# Altium PCB SAMV71_Xplained_Ultra.PcbDoc (part 2 of 9)
Units mm, origin at the board's own origin, x right, y up, seen from the top; angles counter-clockwise.
Board outline 90 x 135 mm, 8 copper layers (Top Layer LF-Signals, Ground Plane 1 (GND), Power Plane (VCC), Ground Plane 2 (GND), Signal Layer 1, Signal Layer 2, Ground Plane 3 (GND), Bottom Layer LF-Signals), stack 1.632 mm thick; 483 components, 411 nets, 1994 pads, 1021 vias.
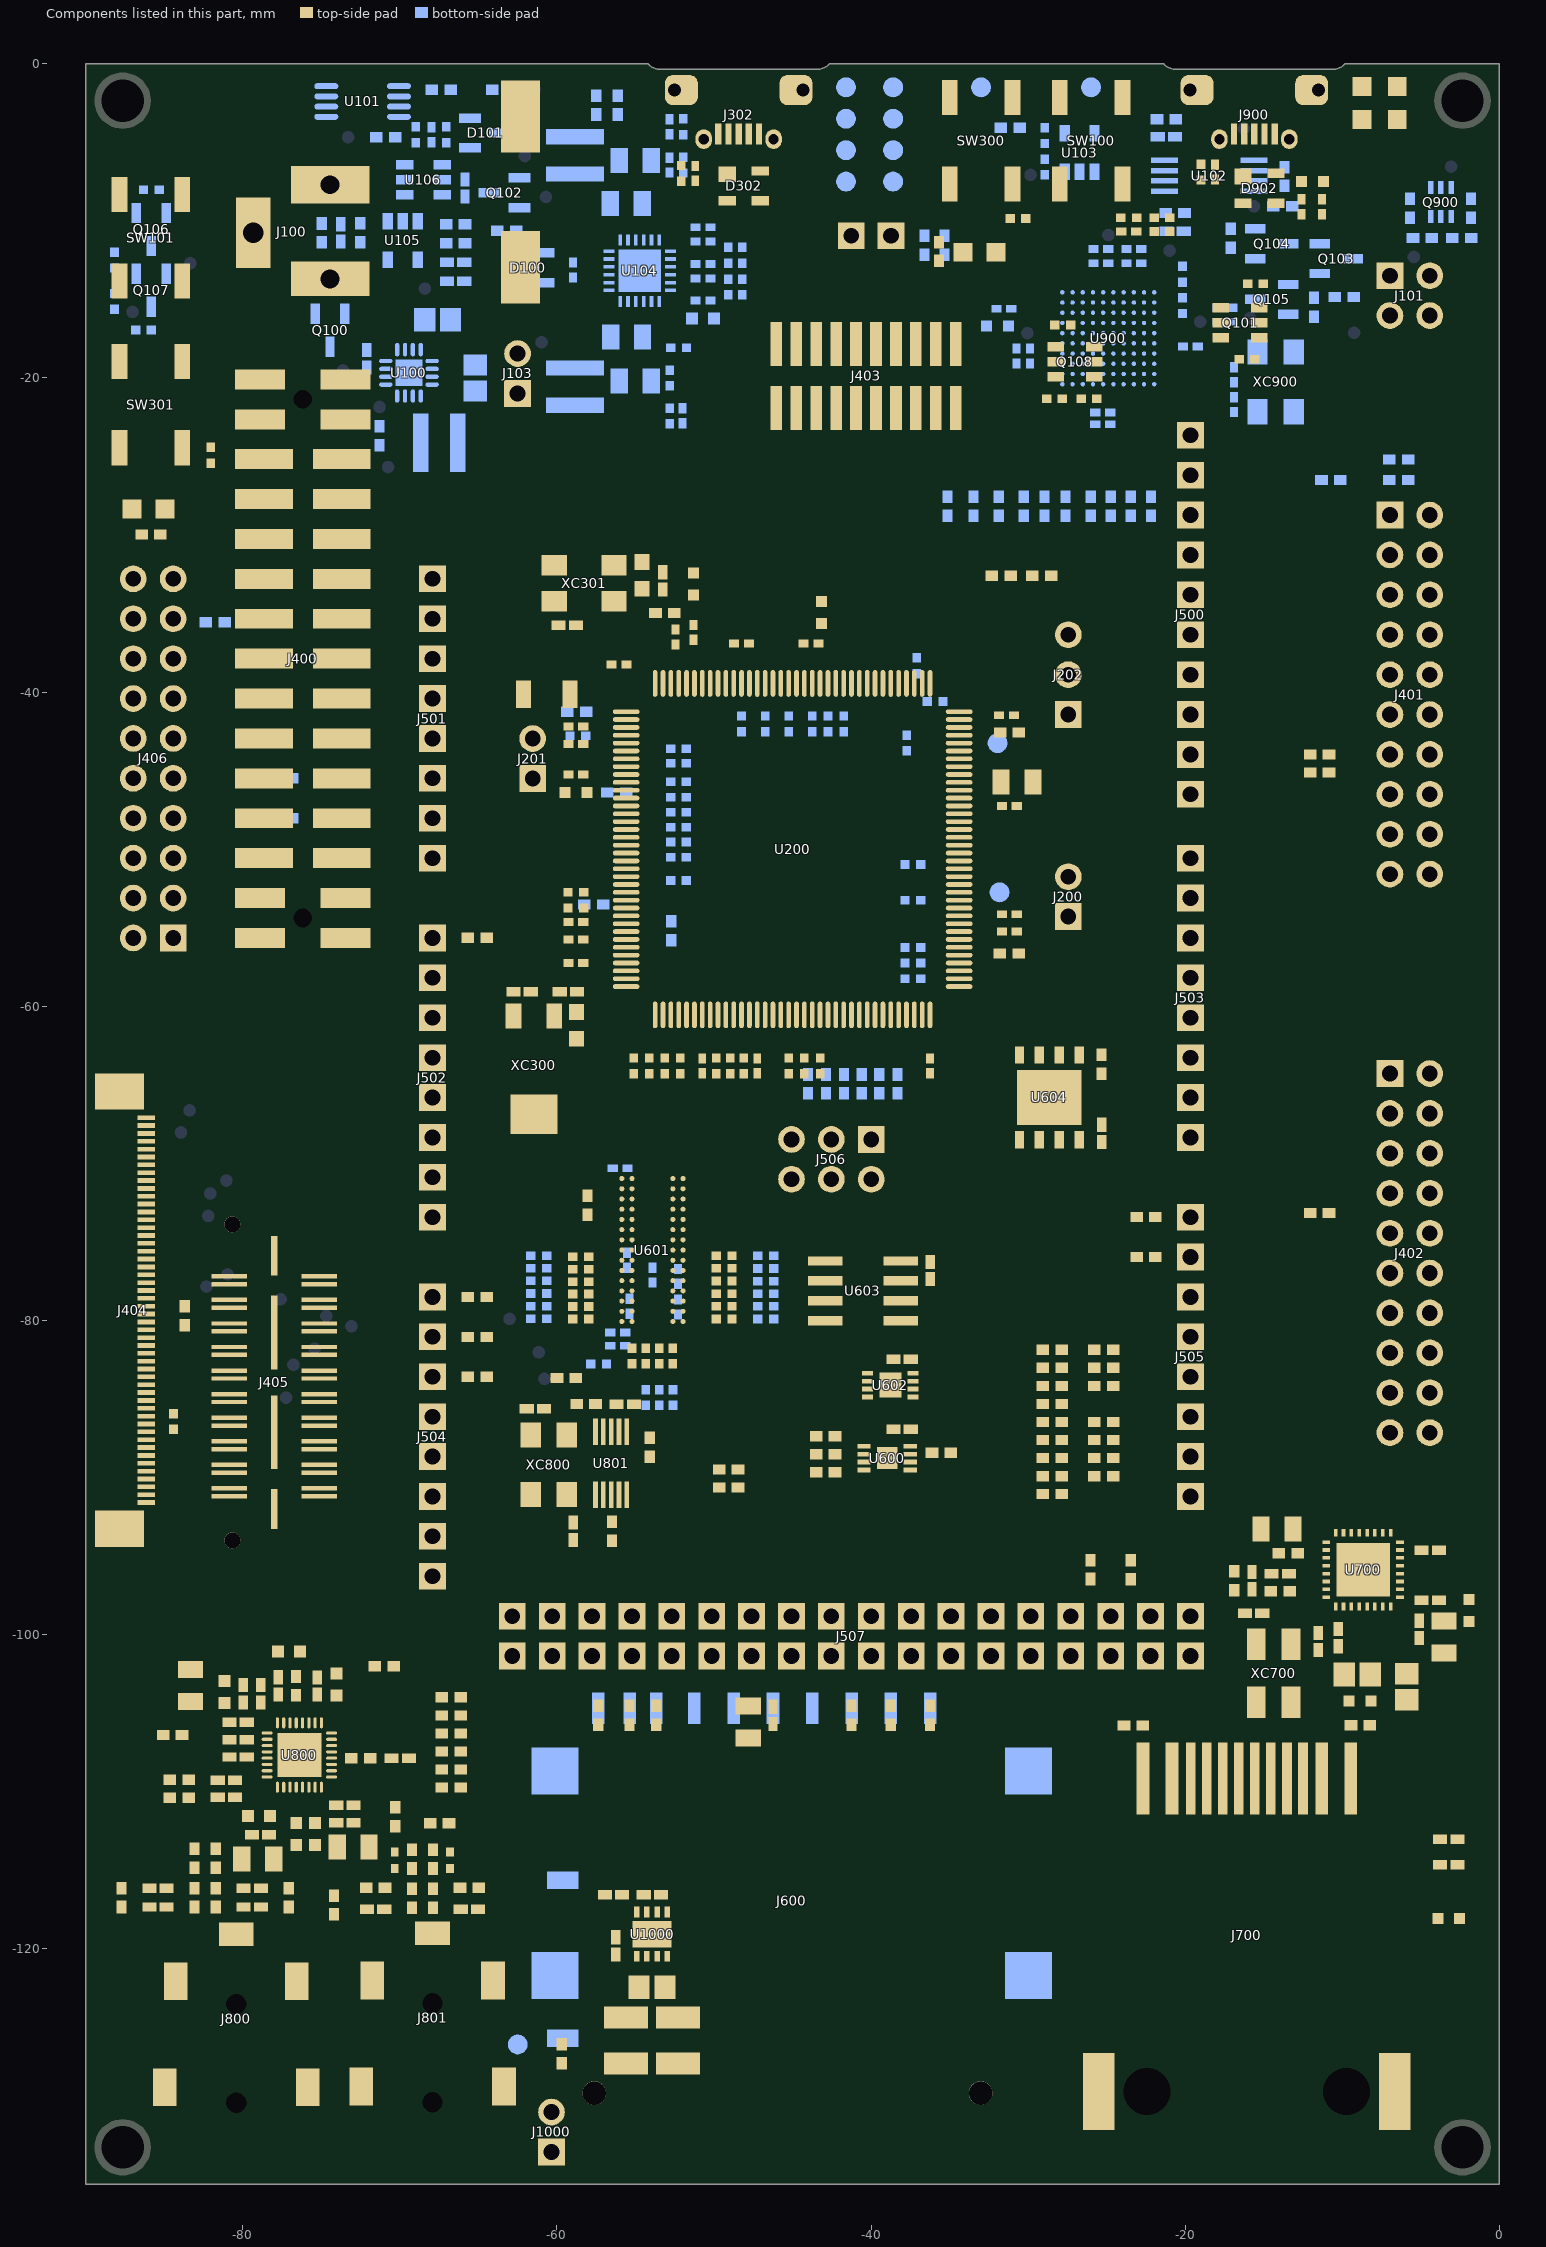
[diagram p8: the components of this part, seen from the top]

## Components (designator, comment, footprint, x,y, rotation, side; value= is the part's Value field where it differs from the comment) (continued)
Q106 "" AP5-00002 -85.825,-10.55 r270 bottom value=IRLML6402
Q107 "" AP5-00002 -85.825,-14.425 r270 bottom value=2N7002,215
Q108 "Farnell no: 9844856" AP5-00008 -27.032,-18.968 r180 top value=FDC6327C
Q900 "" AP5-00001 -3.725,-8.8 r270 bottom value=2N7002DW
R100 "" AP2-00000 -57.507,-2.63 r90 bottom value=0R
R101 "" AP2-00000 -71.3,-23.675 r90 bottom value=100k
R102 "" AP2-00000 -36.6,-11.55 r90 bottom value=47k
R103 "" AP2-00000 -35.325,-11.55 r270 bottom value=47k
R104 "" AP2-00000 -63.2,-10.625 r0 bottom value=30k
R105 "" AP2-00000 -66.456,-10.216 r0 bottom value=470k
R106 "" AP2-00011 -21.475,-9.8 r0 top locked value=100k
R107 "" AP2-00011 -21.475,-10.675 r180 top value=330R
R108 "" AP2-00000 -63.518,-1.65 r180 bottom value=470R
R109 "" AP2-00000 -67.377,-1.65 r180 bottom value=0R
R110 "" AP2-00011 -23.6,-9.8 r0 top locked value=39R
R111 "" AP2-00000 -66.456,-11.43 r180 bottom value=453k
R112 "" AP2-00000 -70.9,-4.675 r0 bottom value=0R
R113 "" AP2-00000 -21.2,-3.525 r180 bottom locked value=1M
R114 "" AP2-00000 -17.1,-11.1 r90 bottom value=100k
R115 "" AP2-00000 -9.875,-14.85 r0 bottom value=39k
R116 "" AP2-00000 -13.675,-7.175 r90 bottom value=470k
R117 "" AP2-00000 -20.65,-9.5 r0 bottom value=470k
R118 "" AP2-00000 -13.8,-9.075 r180 bottom value=390R
R119 "" AP2-00000 -11.8,-15.5 r90 bottom locked value=47k
R120 "" AP2-00011 -28.95,-6.575 r270 bottom value=100k
R121 "" AP2-00011 -28.95,-4.575 r270 bottom value=100k
R122 "" AP2-00011 -52.832,-22.43 r270 bottom value=453k
R123 "" AP2-00011 -52.832,-20.005 r270 bottom value=150k
R124 "" AP2-00011 -51.957,-4.005 r90 bottom value=560k
R125 "" AP2-00011 -86.325,-16.95 r0 bottom value=200k
R126 "" AP2-00011 -51.957,-6.455 r270 bottom value=100k
R127 "" AP2-00011 -85.825,-8.025 r0 bottom value=470k
R128 "" AP2-00011 -48.207,-12.192 r270 bottom value=604K
R129 "" AP2-00011 -88.175,-15.125 r270 bottom value=10k
R130 "" AP2-00011 -49.107,-12.192 r90 bottom value=232K
R131 "" AP2-00011 -88.175,-12.5 r270 bottom value=470k
R132 "" AP2-00011 -48.207,-14.211 r90 bottom value=280k
R133 "" AP2-00011 -49.107,-14.211 r270 bottom value=200k
R134 "" AP2-00011 -52.257,-18.08 r0 bottom value=100k
R135 "" AP2-00000 -72.526,-10.76 r270 bottom value=470k
R136 "" AP2-00000 -74.983,-10.769 r90 bottom value=47k
R137 "" AP2-00011 -67.05,-4.521 r270 bottom value=100k
R138 "" AP2-00011 -69.004,-4.52 r270 bottom value=180k
R139 "" AP2-00011 -28.327,-21.324 r180 top value=330R
R140 "" AP2-00011 -16.075,-18.8 r0 top value=100k
R141 "" AP2-00011 -26.132,-21.324 r0 top value=100k
R142 "" AP2-00011 -27.797,-16.63 r180 top value=100k
R143 "" AP2-00011 -15.525,-14 r180 top value=100k
R200 "" AP2-00000 -66.725,-104 r180 top value=0R
R201 "" AP2-00000 -11.45,-43.975 r0 top value=0R
R202 "" AP2-00000 -11.45,-45.125 r0 top value=0R
R203 "" AP2-00000 -83.706,-79.7 r90 top value=0R
R204 "" AP2-00000 -38.328,-64.949 r270 bottom value=39R
R205 "" AP2-00000 -42.878,-64.949 r270 bottom value=39R
R206 "" AP2-00000 -41.728,-64.949 r90 bottom value=39R
R207 "" AP2-00000 -22.5,-73.419 r0 top value=0R
R208 "" AP2-00000 -22.5,-75.969 r0 top value=0R
R209 "" AP2-00000 -11.45,-73.175 r0 top value=0R
R210 "" AP2-00000 -31.193,-42.578 r0 top value=0R
R211 "" AP2-00000 -23.475,-95.875 r270 top value=0R
R212 "" AP2-00000 -39.478,-64.949 r270 bottom value=39R
R213 "" AP2-00000 -26.025,-95.869 r270 top value=0R
R214 "" AP2-00000 -44.028,-64.949 r90 bottom value=39R
R215 "" AP2-00000 -65.075,-55.644 r180 top value=0R
R216 "" AP2-00000 -58.75,-41.25 r180 bottom value=0R
R217 "" AP2-00000 -56.203,-46.394 r180 bottom value=0R
R218 "" AP2-00000 -52.725,-55.2 r270 bottom value=0R
R219 "" AP2-00000 -65.075,-78.519 r180 top value=0R
R220 "" AP2-00000 -65.075,-81.069 r180 top value=0R
R221 "" AP2-00000 -65.075,-83.594 r180 top value=0R
R222 "" AP2-00000 -57.66,-53.525 r180 bottom value=0R
R223 "" AP2-00000 -66.725,-107.45 r180 top value=0R
R224 "" AP2-00000 -66.725,-109.75 r180 top value=0R
R225 "" AP2-00000 -59.4,-83.675 r0 top value=0R
R226 "" AP2-00000 -66.725,-108.6 r180 top value=0R
R227 "" AP2-00000 -40.6,-64.95 r270 bottom value=39R
R228 "" AP2-00000 -66.725,-106.3 r180 top value=0R
R229 "" AP2-00000 -66.725,-105.15 r180 top value=0R
R230 "" AP2-00000 -54.1,-88.075 r270 top value=0R
R231 "" AP2-00000 -49.075,-89.5 r180 top value=1k
R232 "" AP2-00000 -49.075,-90.65 r180 top value=1k
R233 "" AP2-00000 -53.128,-34.968 r180 top value=5.62k
R234 "" AP2-00000 -31.2,-56.649 r0 top value=0R
R235 "" AP2-00011 -52.267,-46.702 r0 bottom value=22R
R236 "" AP2-00011 -55.111,-63.8 r270 top value=22R
R237 "" AP2-00011 -54.124,-63.8 r270 top value=22R
R238 "" AP2-00011 -53.137,-63.8 r270 top value=22R
R239 "" AP2-00011 -52.151,-63.8 r270 top value=22R
R240 "" AP2-00011 -43.25,-63.8 r270 top value=22R
R241 "" AP2-00011 -45.25,-63.8 r270 top value=22R
R242 "" AP2-00011 -48.975,-63.8 r270 top value=22R
R243 "" AP2-00011 -58.67,-42.775 r180 bottom value=22R
R244 "" AP2-00011 -52.262,-43.606 r0 bottom value=22R
R245 "" AP2-00011 -52.267,-44.522 r0 bottom value=22R
R246 "" AP2-00011 -52.267,-45.705 r0 bottom value=22R
R247 "" AP2-00011 -58.8,-52.75 r180 top value=22R
R248 "" AP2-00011 -58.8,-53.75 r180 top value=22R
R249 "" AP2-00011 -48.1,-63.8 r270 top value=22R
R250 "" AP2-00011 -49.85,-63.8 r270 top value=22R
R251 "" AP2-00011 -41.75,-42.026 r270 bottom value=22R
R252 "" AP2-00011 -42.75,-42.026 r270 bottom value=22R
R253 "" AP2-00011 -43.75,-42.026 r270 bottom value=22R
R254 "" AP2-00011 -45.25,-42.026 r270 bottom value=22R
R255 "" AP2-00011 -46.75,-42.026 r270 bottom value=22R
R256 "" AP2-00011 -48.25,-42.026 r270 bottom value=22R
R257 "" AP2-00011 -52.267,-48.6 r0 bottom value=22R
R258 "" AP2-00011 -52.267,-47.641 r0 bottom value=22R
R259 "" AP2-00011 -37.343,-57.251 r180 bottom value=22R
R260 "" AP2-00011 -52.267,-49.55 r0 bottom value=22R
R261 "" AP2-00011 -37.343,-50.975 r180 bottom value=22R
R262 "" AP2-00011 -52.267,-52 r0 bottom value=22R
R263 "" AP2-00011 -37.343,-58.251 r180 bottom value=22R
R264 "" AP2-00011 -37.343,-53.265 r180 bottom value=22R
R265 "" AP2-00011 -44.25,-63.8 r270 top value=22R
R266 "" AP2-00011 -52.267,-50.513 r0 bottom value=22R
R267 "" AP2-00011 -37.1,-38.325 r270 bottom value=22R
R268 "" AP2-00011 -37.343,-56.265 r180 bottom value=22R
R269 "" AP2-00011 -37.725,-43.25 r270 bottom value=22R
R270 "" AP2-00011 -35.925,-40.6 r180 bottom value=22R
R300 "" AP2-00011 -30.65,-9.85 r0 top locked value=39R
R301 "" AP2-00011 -82.05,-24.925 r270 top value=39R
R302 "" AP2-00000 -85.85,-29.969 r0 top value=330R
R303 "" AP2-00000 -35.675,-11.95 r90 top value=330R
R304 "" AP2-00011 -52.1,-6.978 r90 top locked value=1M
R305 "" AP2-00000 -31.715,-32.6 r180 top value=30k
R306 "" AP2-00000 -29.142,-32.6 r180 top value=47k
R307 "" AP2-00000 -31.15,-4.075 r180 bottom value=330R
R400 "" AP2-00000 -77.45,-48.034 r0 bottom value=0R
R401 "" AP2-00000 -77.45,-45.494 r0 bottom value=0R
R402 "" AP2-00000 -81.759,-35.56 r0 bottom value=0R
R403 "" AP2-00000 -78.777,-40.421 r0 bottom value=0R
R404 "" AP2-00011 -84.414,-86.446 r270 top value=100k
R600 "" AP2-00000 -42.9,-89.675 r180 top value=10k
R601 "" AP2-00000 -42.9,-88.525 r180 top value=10k
R602 "" AP2-00000 -42.9,-87.375 r180 top value=10k
R603 "" AP2-00000 -35.525,-88.425 r180 top value=10k
R604 "" AP2-00000 -58.05,-72.675 r270 top value=100k
R605 "" AP2-00000 -25.325,-63.7 r90 top value=100k
R606 "" AP2-00000 -41.253,-105.15 r270 top value=10k
R607 "" AP2-00000 -38.753,-105.15 r270 top value=100k
R608 "" AP2-00000 -36.253,-105.15 r270 top value=100k
R609 "" AP2-00000 -55.378,-105.15 r270 top value=100k
R610 "" AP2-00000 -53.678,-105.15 r270 top value=100k
R611 "" AP2-00000 -57.378,-105.15 r270 top value=10k
R612 "" AP2-00000 -59.7,-126.7 r270 top value=10k
R613 "" AP2-00011 -52.617,-84.916 r90 bottom value=200R
R614 "" AP2-00011 -46.71,-79.916 r180 bottom value=200R
R615 "" AP2-00011 -46.71,-79.111 r180 bottom value=200R
R616 "" AP2-00011 -46.71,-78.306 r180 bottom value=200R
R617 "" AP2-00011 -53.483,-84.916 r90 bottom value=200R
R618 "" AP2-00011 -46.71,-77.501 r180 bottom value=200R
R619 "" AP2-00011 -46.71,-76.696 r180 bottom value=200R
R620 "" AP2-00011 -46.71,-75.891 r180 bottom value=200R
R621 "" AP2-00011 -61.165,-75.88 r0 bottom value=200R
R622 "" AP2-00011 -61.165,-76.685 r0 bottom value=200R
R623 "" AP2-00011 -61.165,-77.49 r0 bottom value=200R
R624 "" AP2-00011 -54.35,-84.916 r90 bottom value=200R
R625 "" AP2-00011 -61.165,-78.295 r0 bottom value=200R
R626 "" AP2-00011 -61.165,-79.1 r0 bottom value=200R
R627 "" AP2-00011 -61.165,-79.905 r0 bottom value=200R
R628 "" AP2-00011 -57.348,-82.777 r0 bottom value=200R
R629 "" AP2-00011 -55.222,-82.277 r90 top value=33R
R630 "" AP2-00011 -58.486,-79.911 r0 top value=33R
R631 "" AP2-00011 -58.486,-79.119 r0 top value=33R
R632 "" AP2-00011 -58.486,-78.327 r0 top value=33R
R633 "" AP2-00011 -54.355,-82.277 r90 top value=33R
R634 "" AP2-00011 -58.486,-77.534 r0 top value=33R
R635 "" AP2-00011 -58.486,-76.742 r0 top value=33R
R636 "" AP2-00011 -58.486,-75.95 r0 top value=33R
R637 "" AP2-00011 -49.358,-75.885 r180 top value=33R
R638 "" AP2-00011 -49.358,-76.69 r180 top value=33R
R639 "" AP2-00011 -49.358,-77.495 r180 top value=33R
R640 "" AP2-00011 -53.489,-82.277 r90 top value=33R
R641 "" AP2-00011 -49.358,-78.301 r180 top value=33R
R642 "" AP2-00011 -49.358,-79.106 r180 top value=33R
R643 "" AP2-00011 -49.358,-79.911 r180 top value=33R
R644 "" AP2-00011 -52.622,-82.277 r90 top value=33R
R700 "" AP2-00000 -28.469,-91.048 r180 top value=1k
R701 "" AP2-00000 -8.85,-105.775 r0 top value=220R
R702 "" AP2-00000 -16.875,-96.575 r270 top value=100k
R703 "" AP2-00000 -23.3,-105.8 r0 top value=220R
R704 "" AP2-00000 -13.95,-97.25 r0 top value=6.04K
R705 "" AP2-00000 -28.469,-84.173 r180 top value=4.7k
R706 "" AP2-00000 -28.469,-87.623 r180 top value=1k
R707 "" AP2-00000 -28.469,-86.473 r180 top value=4.7k
R708 "" AP2-00000 -28.469,-83.023 r180 top value=4.7k
R709 "" AP2-00000 -28.469,-81.873 r180 top value=4.7k
R710 "" AP2-00000 -28.469,-89.923 r180 top value=4.7k
R711 "" AP2-00000 -28.469,-85.323 r180 top value=4.7k
R712 "" AP2-00000 -13.45,-94.825 r180 top value=4.7k
R713 "" AP2-00000 -28.469,-88.773 r180 top value=4.7k
R714 "" AP2-00000 -25.194,-86.473 r0 top value=4.7k
R715 "" AP2-00000 -25.194,-83.023 r0 top value=4.7k
R716 "" AP2-00000 -25.194,-81.873 r0 top value=4.7k
R717 "" AP2-00000 -25.194,-89.923 r0 top value=4.7k
R718 "" AP2-00000 -25.194,-88.773 r180 top value=4.7k
R719 "" AP2-00000 -25.188,-84.173 r0 top value=4.7k
R720 "" AP2-00000 -25.194,-87.623 r0 top value=4.7k
R800 "" AP2-00000 -83.075,-114.25 r270 top value=0R
R801 "" AP2-00000 -72.5,-107.875 r180 top value=22R
R802 "" AP2-00000 -81.725,-114.25 r270 top value=0R
R803 "" AP2-00000 -69.225,-114.3 r90 top value=2.2k
R804 "" AP2-00000 -67.9,-114.3 r90 top value=2.2k
R806 "" AP2-00000 -70.3,-111.6 r90 top value=0R
R807 "" AP2-00000 -77.075,-116.75 r90 top value=20R
R808 "" AP2-00000 -87.725,-116.75 r90 top value=20R
R809 "" AP2-00000 -84.05,-109.25 r0 top value=20R
R810 "" AP2-00000 -84.05,-110.4 r0 top value=20R
R811 "" AP2-00000 -67.475,-112.025 r180 top value=0R
R812 "" AP2-00000 -71.55,-116.125 r0 top value=47k
R813 "" AP2-00000 -65.575,-116.125 r180 top value=47k
R814 "" AP2-00000 -84.475,-106.4 r0 top value=0R
R815 "" AP2-00000 -74.2,-117.225 r90 top value=0R
R816 "" AP2-00000 -71,-102.025 r180 top value=0R
R817 "" AP2-00000 -58.15,-85.325 r180 top value=39R
R818 "" AP2-00000 -56.5,-93.425 r90 top value=0R
R819 "" AP2-00000 -76.625,-103.275 r270 top value=0R
R900 "" AP2-00000 -35.131,-28.169 r270 bottom value=330R
R901 "" AP2-00000 -10.725,-26.5 r0 bottom locked value=1k
R902 "" AP2-00000 -6.4,-25.2 r0 bottom locked value=1k
R903 "" AP2-00000 -6.4,-26.5 r0 bottom locked value=1k
R904 "" AP2-00000 -28.956,-28.162 r270 bottom value=330R
R905 "" AP2-00000 -27.631,-28.162 r270 bottom value=330R
R906 "" AP2-00000 -5.7,-9.2 r270 bottom locked value=1M
R907 "" AP2-00000 -4.9,-11.1 r180 bottom value=330R
R908 "" AP2-00000 -1.8,-9.2 r90 bottom value=330R
R909 "" AP2-00000 -2.4,-11.1 r180 bottom value=1M
R910 "" AP2-00000 -31.881,-28.169 r90 bottom value=330R
R911 "" AP2-00000 -26.016,-28.162 r90 bottom value=330R
R912 "" AP2-00000 -24.741,-28.162 r90 bottom value=330R
R913 "" AP2-00000 -23.466,-28.162 r90 bottom value=330R
R914 "" AP2-00000 -22.191,-28.162 r90 bottom value=330R
R915 "" AP2-00000 -33.481,-28.169 r270 bottom value=330R
R916 "" AP2-00011 -20.175,-13.4 r90 bottom locked value=39R
R917 "" AP2-00011 -20.175,-15.4 r270 bottom locked value=39R
R918 "" AP2-00011 -17.475,-15.525 r180 bottom locked value=6.81k
R919 "" AP2-00011 -19,-6.9 r90 top locked value=1M
R920 "" AP2-00000 -56.132,-2.63 r270 bottom value=0R
R921 "" AP2-00000 -30.281,-28.162 r270 bottom value=330R
R1000 "Generic component" AP2-00008 -52.305,-125.85 r270 top value=62R
R1001 "Generic component" AP2-00008 -55.605,-125.85 r90 top value=62R
SW100 "" AP8-00137 -26,-4.9 r90 top locked value=SKRAAKE010
SW101 "" AP8-00137 -85.85,-11.075 r90 top value=SKRAAKE010
SW300 "same as A08-0091 but less force is needed; Can be ordered in low volumes from Mouser" AP8-00137 -33,-4.9 r90 top locked value=SKRAAKE010
SW301 "same as A08-0091 but less force is needed; Can be ordered in low volumes from Mouser" AP8-00137 -85.85,-21.7 r90 top value=SKRAAKE010
TP100 "" AP8-00010 -26,-1.5 r270 bottom locked value=TESTPAD
TP200 "" AP8-00010 -31.825,-52.75 r90 bottom locked value=TESTPAD
TP201 "" AP8-00010 -31.95,-43.25 r90 bottom locked value=TESTPAD
TP300 "" AP8-00010 -33,-1.5 r270 bottom locked value=TESTPAD
TP600 "" AP8-00010 -62.5,-126.1 r90 bottom locked value=TESTPAD
TP900 "" AP8-00010 -41.6,-1.5 r270 bottom locked value=TESTPAD
TP901 "" AP8-00010 -38.6,-1.5 r270 bottom locked value=TESTPAD
TP902 "" AP8-00010 -41.6,-3.5 r270 bottom locked value=TESTPAD
TP903 "" AP8-00010 -41.6,-5.5 r270 bottom locked value=TESTPAD
TP904 "" AP8-00010 -38.6,-5.5 r270 bottom locked value=TESTPAD
TP905 "" AP8-00010 -41.6,-7.5 r270 bottom locked value=TESTPAD
TP906 "" AP8-00010 -38.6,-3.5 r270 bottom locked value=TESTPAD
TP907 "" AP8-00010 -38.6,-7.5 r270 bottom locked value=TESTPAD
U100 "100% duty-cycle mode, supports input voltage close to 5V with 5V output!" AP6-00313 -69.425,-19.675 r90 bottom locked value=TPS62143
U101 "" AP6-00382 -72.375,-2.4 r90 bottom locked value=TPS3619-33
U102 "" AP6-00054 -18.475,-7.125 r180 bottom locked value=TPS2113PWR
U103 "" AP6-00087 -26.725,-5.65 r90 bottom value=STMPS2161STR
U104 "Auto-mode, no sync." AP6-00380 -54.732,-13.18 r90 bottom value=LM26480
U105 "" AP6-00087 -69.818,-11.238 r270 bottom value=BU7411SG-TR
U106 "" AP6-00056 -68.499,-7.387 r180 bottom value=TS5A3160DBVR
U200 "" AP6-00118 -45,-50 r0 top locked value="SAMV71Q21B ES2"
U600 "" AP6-00186 -38.975,-88.775 r0 top value=AT24MAC402-MAHM-T
U601 "" AP6-00400 -53.922,-75.525 r180 top locked value="IS42S16100H-7BLI SDRAM"
U602 "" AP6-00409 -38.775,-84.125 r0 top value=ATECC108-MAHDA
U603 "" AP6-00071 -40.525,-78.125 r0 top value=ATECC108-SSHDA
U604 "Also available as 32- and 64-Mbit." AP6-00402 -28.65,-65.8 r270 top locked value=S25FL116K
U700 "Industrial Extended Temperature" AP6-00349 -8.675,-95.875 r90 top value=KSZ8061RNBW
U800 "Wolfson Microelectronics" AP6-00420 -76.4,-107.675 r270 top value="WM8904 Audio Codec"
U801 "" AP6-00097 -56.55,-89.1 r270 top value=CS2100CP-CZZ
U900 "100 ball VFBGA" AP6-00206 -24.9,-17.475 r90 bottom locked value=AT32UC3A4256J-C1UR
U1000 "" AP6-00407 -53.95,-119.08 r270 top locked value=ATA6561-GBQW
XC300 "Farnell order no:1539364" AP7-00044 -61.475,-60.625 r180 top value="32.768kHz +/-20PPM 7pF  SMD"
XC301 "" AP7-00039 -58.275,-33.075 r0 top value=12.00MHz
XC700 "" AP7-00067 -14.376,-102.464 r90 top locked value=7B-25.000MAAJ-T
XC800 "" AP7-00039 -60.525,-89.2 r270 top locked value=12.00MHz
XC900 "" AP7-00039 -14.25,-20.25 r90 bottom locked value=12.00MHz

## Footprints (in the part's own frame and the unit in brackets; to place one, negate y for a bottom-side part, rotate by r counter-clockwise, add the part's x,y. Pads: shape width x height; smd on the part's side, far side on the other; paste and mask are expansions set on the pad)
AP1-00001 [mm] "Standard 0402 SMD capacitor footprint"
  rect 0.9x0.6 smd: 1(-0.55,0) 2(0.55,0)
  silkscreen extent -1.25,-0.55 1.25,0.55, body extent -0.5,-0.3 0.5,0.3, height 0.2
AP1-00003 [mm]
  rect 1.35x1.5 smd: 1(-0.825,0) 2(0.825,0)
  silkscreen extent -1.78,-1 1.78,1, body extent -1,-0.63 1,0.63, height 0.78
AP1-00036 [mm] "SMD capacitors: 3216-18 EIA Case 1206, polarized"
  rect 0.95x1.75 smd: 1(-1.475,0) 2(1.475,0)
  silkscreen extent -2.95,-1.12 2.2,1.12, body extent -1.6,-0.8 1.6,0.8, height 1
AP1-00038 [mm] "Generic pad 0402, spacing 0.45mm"
  rect 0.6x0.5 smd: 1(-0.525,0) 2(0.525,0)
  silkscreen extent -1.05,-0.48 1.05,0.47, body extent -0.5,-0.3 0.5,0.3, height 0.2
AP1-00039 [mil] "Capacitor 0603 Hight 0.8mm"
  rect 30x30 smd: 1(-27.5,0) 2(27.5,0)
  silkscreen extent -52,-24 51,24, body extent -31,-16 32,16, height 12
AP1-00041 [mil]
  rect 43x63 smd: 1(0,0) 2(80,0)
  silkscreen extent -30,-39 109,39, body extent 1,-25 79,25, height 31
AP1-00053 [mm] "Chip Capacitor, 2-Leads, Body 1.0x0.5mm, IPC High Density"
  rect 0.65x0.5 smd: 1(-0.475,0) 2(0.475,0)
  body extent -0.5,-0.3 0.5,0.3, height 0.2
AP1-00122 [mm]
  rect 4.6x2.5 smd: 1(-4.8,0) 2(4.8,0)
  silkscreen extent -6,-6 6,6, body extent -5.4,-5.4 5.4,5.4, height 6.9
AP2-00000 [mm] "Standard 0402 SMD resistor footprint"
  rect 0.8x0.65 smd: 1(-0.6,0) 2(0.6,0)
  silkscreen extent -1.25,-0.58 1.25,0.58, body extent -0.5,-0.3 0.5,0.3, height 0.2
AP2-00008 [mm]
  rect 1.4x2.8 smd: 1(-1.45,0) 2(1.45,0)
  silkscreen extent -2.4,-1.65 2.4,1.65, body extent -1.6,-1.25 1.6,1.25, height 0.55
AP2-00011 [mm] "Chip Resistor, 2-Leads, Body 1,0x0,5mm, IPC High Density"
  rect 0.6x0.55 smd: 1(-0.5,0) 2(0.5,0)
  body extent -0.5,-0.3 0.5,0.3, height 0.2
AP3-00005 [mm]
  rect 0.7x0.7 smd: 1(-0.7,0) 2(0.7,0)
  silkscreen extent -1.3,-0.6 1.3,0.6, body extent -0.83,-0.41 0.82,0.41, height 0.8
AP3-00028 [mm] "0402 SMD EMI inductor footprint, Murata"
  rect 0.8x0.65 smd: 1(-0.6,0) 2(0.6,0)
  silkscreen extent -1.25,-0.58 1.25,0.58, body extent -0.58,-0.3 0.58,0.3, height 0.41
AP3-00104 [mil] "0805 with EMIFIL chip 3D model, hight 0.85mm"
  rect 43x63 smd: 1(-40,0) 2(40,0)
  silkscreen extent -70,-39 69,39, body extent -39,-24 39,24, height 37
AP3-00119 [mm]
  rect 0.98x3.7 smd paste-0.125: 1(-1.185,0) 2(1.185,0)
  body extent -2.15,-2.15 2.15,2.15, height 2.1
AP4-00001 [mm]
  rect 1.1x1 smd: 1(0,0)
  rect 1.1x0.6 smd: 2(0,-1.7) 3(2.1,-1.7) 4(2.1,0.2)
  silkscreen extent -0.82,-2.5 2.93,1, body extent -0.13,-2.2 2.23,0.7, height 1.21
AP4-00007 [mm]
  rect 1.4x0.6 smd: 1(-0.95,0.95) 2(-0.95,-0.95) 3(0.95,0)
  silkscreen extent -1.88,-1.75 1.88,1.75, body extent -1.25,-1.5 1.25,1.5, height 1.07
AP4-00013 [mm] "0805 diode footprint"
  rect 1.2x1.2 smd: 1(-1.05,0) 2(1.05,0)
  silkscreen extent -2.16,-1 1.85,1, body extent -1,-0.63 1,0.63, height 1.1
AP4-00018 [mm]
  rect 1.4x0.6 smd: 1(-0.95,0.95) 2(-0.95,-0.95) 3(0.95,0)
  body extent -1.25,-1.46 1.23,1.46, height 1
AP5-00001 [mm]
  rect 0.85x0.35 smd: 1(-0.925,0.65) 2(-0.925,0) 3(-0.925,-0.65) 4(0.925,-0.65) 5(0.925,0) 6(0.925,0.65)
  silkscreen extent -1.6,-1.35 1.6,1.35, body extent -1.05,-1 1.05,1, height 0.95
AP5-00002 [mm] "SOT-23 Package"
  rect 1.3x0.6 smd: 1(-1.05,0.95) 2(-1.05,-0.95) 3(1.05,0)
  silkscreen extent -1.95,-1.78 1.95,1.78, body extent -1.25,-1.46 1.23,1.46, height 1
AP5-00008 [mm]
  rect 1.05x0.6 smd: 1(-1.225,0.95) 2(-1.225,0) 3(-1.225,-0.95) 4(1.225,-0.95) 5(1.225,0) 6(1.225,0.95)
  silkscreen extent -2,-1.75 2,1.75, body extent -1.5,-1.5 1.5,1.5, height 1.05
AP6-00054 [mm]
  rect 1.7x0.35 smd: 1(-2.85,0.975) 2(-2.85,0.325) 3(-2.85,-0.325) 4(-2.85,-0.975) 5(2.85,-0.975) 6(2.85,-0.325) 7(2.85,0.325) 8(2.85,0.975)
  silkscreen extent -2.98,1.58 -2.73,1.82, body extent -3.23,-1.55 3.23,1.55, height 1.25
AP6-00056 [mm]
  rect 1.1x0.6 smd: 1(-1.2,0.95) 2(-1.2,0) 3(-1.2,-0.95) 4(1.2,-0.95) 5(1.2,0) 6(1.2,0.95)
  silkscreen extent -1.65,-1.55 0.87,1.72, body extent -1.21,-1.4 1.21,1.39, height 1.09
AP6-00071 [mm]
  rect 2.2x0.6 smd: 1(-2.4,1.905) 2(-2.4,0.635) 3(-2.4,-0.635) 4(-2.4,-1.905) 5(2.4,-1.905) 6(2.4,-0.635) 7(2.4,0.635) 8(2.4,1.905)
  silkscreen extent -3.87,-2.75 3.75,2.87, body extent -3,-2.45 3,2.45, height 1.75
AP6-00087 [mm]
  rect 1.05x0.65 smd: 1(-1.225,0.953) 2(-1.225,0) 3(-1.225,-0.953) 4(1.225,-0.953) 5(1.225,0.953)
  silkscreen extent -2,-1.75 2,1.75, body extent -1.5,-1.5 1.5,1.5, height 1.3
AP6-00097 [mm]
  rect 1.7x0.3 smd: 1(-2,1) 2(-2,0.5) 3(-2,0) 4(-2,-0.5) 5(-2,-1) 6(2,-1) 7(2,-0.5) 8(2,0) 9(2,0.5) 10(2,1)
  silkscreen extent -2.65,1.48 -2.4,1.73, body extent -2.45,-1.5 2.45,1.5, height 1.15
AP6-00118 [mm]
  oval 1.7x0.3 smd: 1(-10.6,8.75) 2(-10.6,8.25) 3(-10.6,7.75) 4(-10.6,7.25) 5(-10.6,6.75) 6(-10.6,6.25) 7(-10.6,5.75) 8(-10.6,5.25) 9(-10.6,4.75) 10(-10.6,4.25) 11(-10.6,3.75) 12(-10.6,3.25) 13(-10.6,2.75) 14(-10.6,2.25) 15(-10.6,1.75) 16(-10.6,1.25) 17(-10.6,0.75) 18(-10.6,0.25) 19(-10.6,-0.25) 20(-10.6,-0.75) 21(-10.6,-1.25) 22(-10.6,-1.75) 23(-10.6,-2.25) 24(-10.6,-2.75) 25(-10.6,-3.25) 26(-10.6,-3.75) 27(-10.6,-4.25) 28(-10.6,-4.75) 29(-10.6,-5.25) 30(-10.6,-5.75) 31(-10.6,-6.25) 32(-10.6,-6.75) 33(-10.6,-7.25) 34(-10.6,-7.75) 35(-10.6,-8.25) 36(-10.6,-8.75) 73(10.6,-8.75) 74(10.6,-8.25) 75(10.6,-7.75) 76(10.6,-7.25) 77(10.6,-6.75) 78(10.6,-6.25) 79(10.6,-5.75) 80(10.6,-5.25) 81(10.6,-4.75) 82(10.6,-4.25) 83(10.6,-3.75) 84(10.6,-3.25) 85(10.6,-2.75) 86(10.6,-2.25) 87(10.6,-1.75) 88(10.6,-1.25) 89(10.6,-0.75) 90(10.6,-0.25) 91(10.6,0.25) 92(10.6,0.75) 93(10.6,1.25) 94(10.6,1.75) 95(10.6,2.25) 96(10.6,2.75) 97(10.6,3.25) 98(10.6,3.75) 99(10.6,4.25) 100(10.6,4.75) 101(10.6,5.25) 102(10.6,5.75) 103(10.6,6.25) 104(10.6,6.75) 105(10.6,7.25) 106(10.6,7.75) 107(10.6,8.25) 108(10.6,8.75)
  oval 0.3x1.7 smd: 37(-8.75,-10.55) 38(-8.25,-10.55) 39(-7.75,-10.55) 40(-7.25,-10.55) 41(-6.75,-10.55) 42(-6.25,-10.55) 43(-5.75,-10.55) 44(-5.25,-10.55) 45(-4.75,-10.55) 46(-4.25,-10.55) 47(-3.75,-10.55) 48(-3.25,-10.55) 49(-2.75,-10.55) 50(-2.25,-10.55) 51(-1.75,-10.55) 52(-1.25,-10.55) 53(-0.75,-10.55) 54(-0.25,-10.55) 55(0.25,-10.55) 56(0.75,-10.55) 57(1.25,-10.55) 58(1.75,-10.55) 59(2.25,-10.55) 60(2.75,-10.55) 61(3.25,-10.55) 62(3.75,-10.55) 63(4.25,-10.55) 64(4.75,-10.55) 65(5.25,-10.55) 66(5.75,-10.55) 67(6.25,-10.55) 68(6.75,-10.55) 69(7.25,-10.55) 70(7.75,-10.55) 71(8.25,-10.55) 72(8.75,-10.55) 109(8.75,10.55) 110(8.25,10.55) 111(7.75,10.55) 112(7.25,10.55) 113(6.75,10.55) 114(6.25,10.55) 115(5.75,10.55) 116(5.25,10.55) 117(4.75,10.55) 118(4.25,10.55) 119(3.75,10.55) 120(3.25,10.55) 121(2.75,10.55) 122(2.25,10.55) 123(1.75,10.55) 124(1.25,10.55) 125(0.75,10.55) 126(0.25,10.55) 127(-0.25,10.55) 128(-0.75,10.55) 129(-1.25,10.55) 130(-1.75,10.55) 131(-2.25,10.55) 132(-2.75,10.55) 133(-3.25,10.55) 134(-3.75,10.55) 135(-4.25,10.55) 136(-4.75,10.55) 137(-5.25,10.55) 138(-5.75,10.55) 139(-6.25,10.55) 140(-6.75,10.55) 141(-7.25,10.55) 142(-7.75,10.55) 143(-8.25,10.55) 144(-8.75,10.55)
  silkscreen extent -12.5,-12.5 12.5,12.5, body extent -11,-11 11,11, height 1.71
AP6-00186 [mm] "8M2, 8-lead 2.0x3.0 mm Body, 0.50 mm Pitch,  WDFN, Very Very Thin, Dual No Lead Package"
  round 0.264 on Top Paste: 0(-0.425,-0.4) 0(-0.425,0.4) 0(0,0) 0(0.425,-0.4) 0(0.425,0.4)
  rect 0.85x0.3 smd: 1(-1.475,0.75) 2(-1.475,0.25) 3(-1.475,-0.25) 4(-1.475,-0.75) 5(1.475,-0.75) 6(1.475,-0.25) 7(1.475,0.25) 8(1.475,0.75)
  rect 1.3x1.4 smd paste-0.7: 9(0,0)
  silkscreen extent -2.26,-1.3 2.2,1.33, body extent -1.53,-1 1.53,1, height 0.76
AP6-00206 [mm] "100 ball (10x10 array) VFBGA. Pitch 0.65 mm. Width: 7 mm. Length: 7mm. Height: 1 mm"
  round 0.28 smd: A1(-2.925,2.925) A2(-2.275,2.925) A3(-1.625,2.925) A4(-0.975,2.925) A5(-0.325,2.925) A6(0.325,2.925) A7(0.975,2.925) A8(1.625,2.925) A9(2.275,2.925) A10(2.925,2.925) B1(-2.925,2.275) B2(-2.275,2.275) B3(-1.625,2.275) B4(-0.975,2.275) B5(-0.325,2.275) B6(0.325,2.275) B7(0.975,2.275) B8(1.625,2.275) B9(2.275,2.275) B10(2.925,2.275) C1(-2.925,1.625) C2(-2.275,1.625) C3(-1.625,1.625) C4(-0.975,1.625) C5(-0.325,1.625) C6(0.325,1.625) C7(0.975,1.625) C8(1.625,1.625) C9(2.275,1.625) C10(2.925,1.625) D1(-2.925,0.975) D2(-2.275,0.975) D3(-1.625,0.975) D4(-0.975,0.975) D5(-0.325,0.975) D6(0.325,0.975) D7(0.975,0.975) D8(1.625,0.975) D9(2.275,0.975) D10(2.925,0.975) E1(-2.925,0.325) E2(-2.275,0.325) E3(-1.625,0.325) E4(-0.975,0.325) E5(-0.325,0.325) E6(0.325,0.325) E7(0.975,0.325) E8(1.625,0.325) E9(2.275,0.325) E10(2.925,0.325) F1(-2.925,-0.325) F2(-2.275,-0.325) F3(-1.625,-0.325) F4(-0.975,-0.325) F5(-0.325,-0.325) F6(0.325,-0.325) F7(0.975,-0.325) F8(1.625,-0.325) F9(2.275,-0.325) F10(2.925,-0.325) G1(-2.925,-0.975) G2(-2.275,-0.975) G3(-1.625,-0.975) G4(-0.975,-0.975) G5(-0.325,-0.975) G6(0.325,-0.975) G7(0.975,-0.975) G8(1.625,-0.975) G9(2.275,-0.975) G10(2.925,-0.975) H1(-2.925,-1.625) H2(-2.275,-1.625) H3(-1.625,-1.625) H4(-0.975,-1.625) H5(-0.325,-1.625) H6(0.325,-1.625) H7(0.975,-1.625) H8(1.625,-1.625) H9(2.275,-1.625) H10(2.925,-1.625) J1(-2.925,-2.275) J2(-2.275,-2.275) J3(-1.625,-2.275) J4(-0.975,-2.275) J5(-0.325,-2.275) J6(0.325,-2.275) J7(0.975,-2.275) J8(1.625,-2.275) J9(2.275,-2.275) J10(2.925,-2.275) K1(-2.925,-2.925) K2(-2.275,-2.925) K3(-1.625,-2.925) K4(-0.975,-2.925) K5(-0.325,-2.925) K6(0.325,-2.925) K7(0.975,-2.925) K8(1.625,-2.925) K9(2.275,-2.925) K10(2.925,-2.925)
  silkscreen extent -4.15,-4.15 4.15,4.15, body extent -3.5,-3.5 3.5,3.5, height 1.01
AP6-00313 [mm] "QFN, 16-Leads, Body 3,2x3,2mm (max), Pitch 0,50mm, IPC Medium Density"
  rect 1.7x1.7 smd paste-1.7: 0(0,0)
  oval 0.85x0.28 smd: 1(-1.475,0.75) 2(-1.475,0.25) 3(-1.475,-0.25) 4(-1.475,-0.75) 9(1.475,-0.75) 10(1.475,-0.25) 11(1.475,0.25) 12(1.475,0.75)
  oval 0.28x0.85 smd: 5(-0.75,-1.475) 6(-0.25,-1.475) 7(0.25,-1.475) 8(0.75,-1.475) 13(0.75,1.475) 14(0.25,1.475) 15(-0.25,1.475) 16(-0.75,1.475)
  silkscreen extent -2.17,-1.6 1.6,1.6, body extent -1.5,-1.5 1.5,1.5, height 0.9
AP6-00349 [mm] "QFN55-32LD-LP-1"
  rect 0.5x0.23 smd: 1(-2.35,1.75) 2(-2.35,1.25) 3(-2.35,0.75) 4(-2.35,0.25) 5(-2.35,-0.25) 6(-2.35,-0.75) 7(-2.35,-1.25) 8(-2.35,-1.75) 17(2.35,-1.75) 18(2.35,-1.25) 19(2.35,-0.75) 20(2.35,-0.25) 21(2.35,0.25) 22(2.35,0.75) 23(2.35,1.25) 24(2.35,1.75)
  rect 0.23x0.5 smd: 9(-1.75,-2.35) 10(-1.25,-2.35) 11(-0.75,-2.35) 12(-0.25,-2.35) 13(0.25,-2.35) 14(0.75,-2.35) 15(1.25,-2.35) 16(1.75,-2.35) 25(1.75,2.35) 26(1.25,2.35) 27(0.75,2.35) 28(0.25,2.35) 29(-0.25,2.35) 30(-0.75,2.35) 31(-1.25,2.35) 32(-1.75,2.35)
  rect 3.4x3.4 smd paste-1.7: 33(0,0)
  silkscreen extent -3,-3 3,3, body extent -2.51,-2.51 2.51,2.51, height 0.8
AP6-00380 [mm] "QFN24, 4x4mm, 0.5 pitch"
  round 0.6 on Bottom Paste: 0(-0.65,-0.65) 0(-0.65,0.65) 0(0,0) 0(0.65,-0.65) 0(0.65,0.65)
  rect 0.7x0.23 smd mask+0.05: 1(-1.95,1.25) 2(-1.95,0.75) 3(-1.95,0.25) 4(-1.95,-0.25) 5(-1.95,-0.75) 6(-1.95,-1.25) 13(1.95,-1.25) 14(1.95,-0.75) 15(1.95,-0.25) 16(1.95,0.25) 17(1.95,0.75) 18(1.95,1.25)
  rect 0.23x0.7 smd mask+0.05: 7(-1.25,-1.95) 8(-0.75,-1.95) 9(-0.25,-1.95) 10(0.25,-1.95) 11(0.75,-1.95) 12(1.25,-1.95) 19(1.25,1.95) 20(0.75,1.95) 21(0.25,1.95) 22(-0.25,1.95) 23(-0.75,1.95) 24(-1.25,1.95)
  rect 2.7x2.7 smd paste-2 mask+0.05: 25(0,0)
  silkscreen extent -2.47,-2.47 2.47,2.47, body extent -2,-2 2,2, height 1
AP6-00382 [mil] "VSSOP"
  oval 15x60 smd: 1(-38.39,-91.02) 2(-12.8,-91.02) 3(12.8,-91.02) 4(38.39,-91.02) 5(38.39,91.02) 6(12.8,91.02) 7(-12.8,91.02) 8(-38.39,91.02)
  silkscreen extent -95,-147 61,61, body extent -59,-96 59,97, height 37
AP6-00400 [mm] "FBGA60"
  round 0.32 smd mask+0.075: A1(-1.95,4.55) A2(-1.3,4.55) A6(1.3,4.55) A7(1.95,4.55) B1(-1.95,3.9) B2(-1.3,3.9) B6(1.3,3.9) B7(1.95,3.9) C1(-1.95,3.25) C2(-1.3,3.25) C6(1.3,3.25) C7(1.95,3.25) D1(-1.95,2.6) D2(-1.3,2.6) D6(1.3,2.6) D7(1.95,2.6) E1(-1.95,1.95) E2(-1.3,1.95) E6(1.3,1.95) E7(1.95,1.95) F1(-1.95,1.3) F2(-1.3,1.3) F6(1.3,1.3) F7(1.95,1.3) G1(-1.95,0.65) G2(-1.3,0.65) G6(1.3,0.65) G7(1.95,0.65) H1(-1.95,0) H2(-1.3,0) H6(1.3,0) H7(1.95,0) J1(-1.95,-0.65) J2(-1.3,-0.65) J6(1.3,-0.65) J7(1.95,-0.65) K1(-1.95,-1.3) K2(-1.3,-1.3) K6(1.3,-1.3) K7(1.95,-1.3) L1(-1.95,-1.95) L2(-1.3,-1.95) L6(1.3,-1.95) L7(1.95,-1.95) M1(-1.95,-2.6) M2(-1.3,-2.6) M6(1.3,-2.6) M7(1.95,-2.6) N1(-1.95,-3.25) N2(-1.3,-3.25) N6(1.3,-3.25) N7(1.95,-3.25) P1(-1.95,-3.9) P2(-1.3,-3.9) P6(1.3,-3.9) P7(1.95,-3.9) R1(-1.95,-4.55) R2(-1.3,-4.55) R6(1.3,-4.55) R7(1.95,-4.55)
  silkscreen extent -4.12,-5.3 3.45,5.57, body extent -3.25,-5.1 3.25,5.1, height 1.2
AP6-00402 [mm]
  rect 3.5x4.1 smd: 0(0,0)
  rect 1.1x0.6 smd: 1(-2.7,1.905) 2(-2.7,0.635) 3(-2.7,-0.635) 4(-2.7,-1.905) 5(2.7,-1.905) 6(2.7,-0.635) 7(2.7,0.635) 8(2.7,1.905)
  silkscreen extent -4.8,-2.7 3.5,2.7, body extent -3,-2.5 3,2.5, height 0.8
AP6-00407 [mm] "DFN8 package"
  rect 0.675x0.35 smd: 1(-1.412,0.975) 2(-1.412,0.325) 3(-1.412,-0.325) 4(-1.412,-0.975) 5(1.412,-0.975) 6(1.412,-0.325) 7(1.412,0.325) 8(1.412,0.975)
  rect 1.7x2.5 smd paste-3: 9(0,0)
  silkscreen extent -2.07,-1.75 1.95,1.88, body extent -1.55,-1.55 1.55,1.55, height 1
AP6-00409 [mm]
  rect 0.7x0.3 smd mask+0.075: 1(-1.45,0.75) 2(-1.45,0.25) 3(-1.45,-0.25) 4(-1.45,-0.75) 5(1.45,-0.75) 6(1.45,-0.25) 7(1.45,0.25) 8(1.45,0.75)
  rect 1.4x1.6 smd paste-0.025 mask+0.075: 9(0,0)
  silkscreen extent -2,-1.1 2,1.45, body extent -1.55,-1.05 1.55,1.05, height 0.6
AP6-00420 [mm] "QFN, 32-Leads, Body 4x4mm, Pitch 0.40mm, IPC Medium Density"
  oval 0.7x0.2 smd mask+0.05: 1(-2.05,1.4) 2(-2.05,1) 3(-2.05,0.6) 4(-2.05,0.2) 5(-2.05,-0.2) 6(-2.05,-0.6) 7(-2.05,-1) 8(-2.05,-1.4) 17(2.05,-1.4) 18(2.05,-1) 19(2.05,-0.6) 20(2.05,-0.2) 21(2.05,0.2) 22(2.05,0.6) 23(2.05,1) 24(2.05,1.4)
  oval 0.2x0.7 smd mask+0.05: 9(-1.4,-2.05) 10(-1,-2.05) 11(-0.6,-2.05) 12(-0.2,-2.05) 13(0.2,-2.05) 14(0.6,-2.05) 15(1,-2.05) 16(1.4,-2.05) 25(1.4,2.05) 26(1,2.05) 27(0.6,2.05) 28(0.2,2.05) 29(-0.2,2.05) 30(-0.6,2.05) 31(-1,2.05) 32(-1.4,2.05)
  rect 2.8x2.8 smd: 33(0,0)
  silkscreen extent -2.73,-2.1 2.1,2.15, body extent -2.08,-2.07 2.07,2.08, height 0.6
AP7-00039 [mm] "FOX FQ5032B"
  rect 1.6x1.3 smd: 1(-1.9,-1.15) 2(1.9,-1.15) 3(1.9,1.15) 4(-1.9,1.15)
  silkscreen extent -3,-2.1 3,2.1, body extent -2.5,-1.6 2.5,1.6, height 1
AP7-00044 [mm]
  rect 1x1.6 smd: 1(-1.3,0) 2(1.3,0)
  rect 3x2.5 smd: 3(0,6.25)
  silkscreen extent -2,-1 2,7.7, body extent -1.5,-0.7 1.5,7.4, height 2.08
AP7-00067 [mm]
  rect 2x1.2 smd: 1(-1.85,-1.1) 2(1.85,-1.1) 3(1.85,1.1) 4(-1.85,1.1)
  silkscreen extent -3.32,-2.15 3.2,2.05, body extent -2.5,-1.6 2.5,1.6, height 1
AP8-00010 [mm] "Testpad 50mil"
  round 1.27 smd paste-0.635: 1(0,0)
AP8-00137 [mm]
  rect 2.25x1 smd: 1(-2.75,2) 2(2.75,2) 3(-2.75,-2) 4(2.75,-2)
  silkscreen extent -4.25,-3.25 4.25,3.25, body extent -3.4,-3.21 3.4,3.22, height 3.47
AP8-00182 [mm] "Pin-in-Paste, Throughhole pin-header (2x3 array). Pitch 2.54 mm"
  rect 1.7x1.7 / inner round 1.7 / far side rect 1.7x1.7 hole 1: 1(-2.54,-1.27)
  rect 1.75x1.75 on Top Paste: 1(-2.54,-1.27) 2(-2.54,1.27) 3(0,-1.27) 4(0,1.27) 5(2.54,-1.27) 6(2.54,1.27)
  round 1.7 hole 1: 2(-2.54,1.27) 3(0,-1.27) 4(0,1.27) 5(2.54,-1.27) 6(2.54,1.27)
  silkscreen extent -3.8,-2.54 3.81,2.54, body extent -3.81,-2.54 3.81,2.54, height 8.56
AP8-00192 [mm]
  silkscreen extent -4,-4 3.86,4, body extent -4,-4 4,4, height 2.79
AP8-00259 [mm]
  rect 2.1x2.1 on Top Paste: 0(-21.59,-1.27) 0(-21.59,1.27) 0(-19.05,-1.27) 0(-19.05,1.27) 0(-16.51,-1.27) 0(-16.51,1.27) 0(-13.97,-1.27) 0(-13.97,1.27) 0(-11.43,-1.27) 0(-11.43,1.27) 0(-8.89,-1.27) 0(-8.89,1.27) 0(-6.35,-1.27) 0(-6.35,1.27) 0(-3.81,-1.27) 0(-3.81,1.27) 0(-1.27,1.27) 0(-1.27,-1.27) 0(1.27,1.27) 0(1.27,-1.27) 0(3.81,-1.27) 0(3.81,1.27) 0(6.35,-1.27) 0(6.35,1.27) 0(8.89,-1.27) 0(8.89,1.27) 0(11.43,-1.27) 0(11.43,1.27) 0(13.97,-1.27) 0(13.97,1.27) 0(16.51,-1.27) 0(16.51,1.27) 0(19.05,-1.27) 0(19.05,1.27) 0(21.59,-1.27) 0(21.59,1.27)
  rect 1.7x1.7 / inner round 1.7 / far side round 1.7 hole 1: 1(-21.59,-1.27) 2(-21.59,1.27) 3(-19.05,-1.27) 4(-19.05,1.27) 5(-16.51,-1.27) 6(-16.51,1.27) 7(-13.97,-1.27) 8(-13.97,1.27) 9(-11.43,-1.27) 10(-11.43,1.27) 11(-8.89,-1.27) 12(-8.89,1.27) 13(-6.35,-1.27) 14(-6.35,1.27) 15(-3.81,-1.27) 16(-3.81,1.27) 17(-1.27,-1.27) 18(-1.27,1.27) 19(1.27,-1.27) 20(1.27,1.27) 21(3.81,-1.27) 22(3.81,1.27) 23(6.35,-1.27) 24(6.35,1.27) 25(8.89,-1.27) 26(8.89,1.27) 27(11.43,-1.27) 28(11.43,1.27) 29(13.97,-1.27) 30(13.97,1.27) 31(16.51,-1.27) 32(16.51,1.27) 33(19.05,-1.27) 34(19.05,1.27) 35(21.59,-1.27) 36(21.59,1.27)
  silkscreen extent -23.3,-2.75 23.3,2.75, body extent -23.11,-2.53 23.11,2.43, height 8.52
AP8-00317 [mm] "Placement area for 18x6mm sticker"
  silkscreen extent 0,0 18,6
AP8-00367 [mm] "1x2 pin header, right angle, 2.54 mm pitch, through-hole"
  rect 1.7x1.7 / inner round 1.7 / far side round 1.7 hole 1: 1(-1.27,0) 2(1.27,0)
  silkscreen extent -2.65,-1.38 2.66,10.6, body extent -2.54,-0.33 2.54,9.99, height 2.55
AP8-00377 [mm]
  round 1.5 hole 1.5 unplated: 0(-12.575,14) 0(12.025,14)
  rect 0.8x2 smd paste+0 mask+0.2: 1(6.305,-10.5) 2(3.805,-10.5) 3(1.305,-10.5) 4(-1.195,-10.5) 5(-3.695,-10.5) 6(-6.195,-10.5) 7(-8.625,-10.5) 8(-10.325,-10.5) 9(8.805,-10.5) 10(-12.325,-10.5)
  rect 2x1.1 smd paste+0 mask+0.2: 11(-14.575,0.45) 12(-14.575,10.5)
  rect 3x3 smd paste+0 mask+0.2: 13(-15.075,-6.5) 14(-15.075,6.5) 15(15.075,6.5) 16(15.075,-6.5)
  silkscreen extent -14.1,-10.9 14.01,18.5, body extent -13.99,-9.5 14,18.5, height 2.7
AP8-00397 [mm] "3.5mm headphone jack"
  round 0 hole 1.3 unplated: 0(0,2.75) 0(0,-3.55)
  rect 1.5x2.4 smd: 1(-3.85,-5) 3(3.85,-5) 4(-4.55,1.75) 5(4.55,1.75)
  rect 2.2x1.5 smd: 2(0,-8)
  silkscreen extent -4.3,-7.75 4.3,7.75, body extent -4.59,-8.29 4.61,7.51, height 6
AP8-00525 [mm] "Jumper 2.54mm, 3D"
  body extent -2.49,0 2.49,5.97, height 2.52
AP8-00622 [mm] "2x10 Right angle 2.54mm THM"
  rect 1.7x1.7 / inner round 1.7 / far side rect 1.7x1.7 hole 1: 1(-11.43,-1.27)
  rect 2.1x2.1 on Top Paste: 1(-11.43,-1.27) 2(-11.43,1.27) 3(-8.89,-1.27) 4(-8.89,1.27) 5(-6.35,-1.27) 6(-6.35,1.27) 7(-3.81,-1.27) 8(-3.81,1.27) 9(-1.27,-1.27) 10(-1.27,1.27) 11(1.27,-1.27) 12(1.27,1.27) 13(3.81,-1.27) 14(3.81,1.27) 15(6.35,-1.27) 16(6.35,1.27) 17(8.89,-1.27) 18(8.89,1.27) 19(11.43,-1.27) 20(11.43,1.27)
  round 1.7 hole 1: 2(-11.43,1.27) 3(-8.89,-1.27) 4(-8.89,1.27) 5(-6.35,-1.27) 6(-6.35,1.27) 7(-3.81,-1.27) 8(-3.81,1.27) 9(-1.27,-1.27) 10(-1.27,1.27) 11(1.27,-1.27) 12(1.27,1.27) 13(3.81,-1.27) 14(3.81,1.27) 15(6.35,-1.27) 16(6.35,1.27) 17(8.89,-1.27) 18(8.89,1.27) 19(11.43,-1.27) 20(11.43,1.27)
  silkscreen extent -12.85,2.77 12.85,5.31, body extent -12.7,-1.59 12.7,11.29, height 5
AP8-00628 [mm] "2x2 Right angle 2.54mm THM"
  rect 1.7x1.7 / inner round 1.7 / far side rect 1.7x1.7 hole 1: 1(-1.27,-1.27)
  rect 2.1x2.1 on Top Paste: 1(-1.27,-1.27) 2(-1.27,1.27) 3(1.27,-1.27) 4(1.27,1.27)
  round 1.7 hole 1: 2(-1.27,1.27) 3(1.27,-1.27) 4(1.27,1.27)
  silkscreen extent -2.69,2.77 2.67,5.31, body extent -2.54,-1.52 2.54,11.36, height 5
AP8-00733 [mm] "Pin header 1x2 Pin in Paste"
  rect 1.7x1.7 / inner round 1.7 / far side rect 1.7x1.7 hole 1: 1(-1.27,0)
  rect 2.1x2.1 on Top Paste: 1(-1.27,0) 2(1.27,0)
  round 1.7 hole 1: 2(1.27,0)
  silkscreen extent -2.54,-1.48 2.54,1.48, body extent -2.54,-1.27 2.54,1.27, height 8.38
AP8-00744 [mm] "Pin header, 2x10, 2.54mm, THM, 1mm hole"
  rect 1.7x1.7 / inner round 1.7 / far side rect 1.7x1.7 hole 1: 1(-11.43,-1.27)
  rect 2.1x2.1 on Top Paste: 1(-11.43,-1.27) 2(-11.43,1.27) 3(-8.89,-1.27) 4(-8.89,1.27) 5(-6.35,-1.27) 6(-6.35,1.27) 7(-3.81,-1.27) 8(-3.81,1.27) 9(-1.27,-1.27) 10(-1.27,1.27) 11(1.27,-1.27) 12(1.27,1.27) 13(3.81,-1.27) 14(3.81,1.27) 15(6.35,-1.27) 16(6.35,1.27) 17(8.89,-1.27) 18(8.89,1.27) 19(11.43,-1.27) 20(11.43,1.27)
  round 1.7 hole 1: 2(-11.43,1.27) 3(-8.89,-1.27) 4(-8.89,1.27) 5(-6.35,-1.27) 6(-6.35,1.27) 7(-3.81,-1.27) 8(-3.81,1.27) 9(-1.27,-1.27) 10(-1.27,1.27) 11(1.27,-1.27) 12(1.27,1.27) 13(3.81,-1.27) 14(3.81,1.27) 15(6.35,-1.27) 16(6.35,1.27) 17(8.89,-1.27) 18(8.89,1.27) 19(11.43,-1.27) 20(11.43,1.27)
  silkscreen extent -12.7,-2.75 12.7,2.75, body extent -12.7,-2.54 12.7,2.54, height 8.4
AP8-00745 [mm] "THM Pin-header 1x3 100mil pitch, 1mm hole"
  rect 1.7x1.7 / inner round 1.7 / far side rect 1.7x1.7 hole 1: 1(-2.54,0)
  rect 2.1x2.1 on Top Paste: 1(-2.54,0) 2(0,0) 3(2.54,0)
  round 1.7 hole 1: 2(0,0) 3(2.54,0)
  silkscreen extent -3.81,-1.48 3.81,1.48, body extent -3.81,-1.27 3.81,1.27, height 8.38
AP8-00749 [mm]
  rect 0x0 hole 3 unplated: 0(-6.35,7.97) 0(6.35,7.97)
  rect 0.81x4.6 smd: 1(-6.61,-11.95) 2(-4.77,-11.95) 11(4.77,-11.95) 12(6.61,-11.95)
  rect 0.61x4.6 smd: 3(-3.57,-11.95) 4(-2.55,-11.95) 5(-1.53,-11.95) 6(-0.51,-11.95) 7(0.51,-11.95) 8(1.53,-11.95) 9(2.55,-11.95) 10(3.57,-11.95)
  rect 2x4.9 smd: 13(-9.42,7.97) 14(9.42,7.97)
  Top Layer LF-Signals region: -10.42,5.52 -10.42,10.42 -7.42,10.42 -7.42,9.484 -7.42,9.485 -7.419,9.48 -7.993,8.82 -8.2,7.97 -7.993,7.12 -7.419,6.46 -7.419,6.46 -7.42,6.46 -7.42,5.52
  Top Layer LF-Signals region: 7.42,5.52 7.42,6.456 7.419,6.46 7.993,7.12 8.2,7.97 7.993,8.82 7.419,9.48 7.419,9.48 7.42,9.48 7.42,10.42 10.42,10.42 10.42,5.52
  silkscreen extent -11,-14.7 11,13.25, body extent -9.65,-13.34 9.65,13.4, height 15.2
AP8-00774 [mm] "50 pin single sided FPC connector 5-1734839-0"
  rect 2.3x3.1 smd: 0(-13.92,0.3) 0(13.92,0.3)
  rect 0.3x1.1 smd: 1(-12.25,2) 2(-11.75,2) 3(-11.25,2) 4(-10.75,2) 5(-10.25,2) 6(-9.75,2) 7(-9.25,2) 8(-8.75,2) 9(-8.25,2) 10(-7.75,2) 11(-7.25,2) 12(-6.75,2) 13(-6.25,2) 14(-5.75,2) 15(-5.25,2) 16(-4.75,2) 17(-4.25,2) 18(-3.75,2) 19(-3.25,2) 20(-2.75,2) 21(-2.25,2) 22(-1.75,2) 23(-1.25,2) 24(-0.75,2) 25(-0.25,2) 26(0.25,2) 27(0.75,2) 28(1.25,2) 29(1.75,2) 30(2.25,2) 31(2.75,2) 32(3.25,2) 33(3.75,2) 34(4.25,2) 35(4.75,2) 36(5.25,2) 37(5.75,2) 38(6.25,2) 39(6.75,2) 40(7.25,2) 41(7.75,2) 42(8.25,2) 43(8.75,2) 44(9.25,2) 45(9.75,2) 46(10.25,2) 47(10.75,2) 48(11.25,2) 49(11.75,2) 50(12.25,2)
  silkscreen extent -15.51,-1.85 15.5,3.18, body extent -15.22,-2.55 15.21,2.56, height 2.03
AP8-00822 [mm]
  rect 1.7x1.7 / inner round 1.7 / far side round 1.7 hole 1: 1(-11.43,0) 2(-8.89,0) 3(-6.35,0) 4(-3.81,0) 5(-1.27,0) 6(1.27,0) 7(3.81,0) 8(6.35,0) 9(8.89,0) 10(11.43,0)
  rect 2.1x2.1 on Top Paste: 1(-11.43,0) 2(-8.89,0) 3(-6.35,0) 4(-3.81,0) 5(-1.27,0) 6(1.27,0) 7(3.81,0) 8(6.35,0) 9(8.89,0) 10(11.43,0)
  silkscreen extent -13.21,-1.4 13.21,1.4, body extent -12.95,-1.21 12.95,1.21, height 8.51
AP8-00823 [mm]
  rect 1.7x1.7 / inner round 1.7 / far side round 1.7 hole 1: 1(-8.89,0) 2(-6.35,0) 3(-3.81,0) 4(-1.27,0) 5(1.27,0) 6(3.81,0) 7(6.35,0) 8(8.89,0)
  rect 2.1x2.1 on Top Paste: 1(-8.89,0) 2(-6.35,0) 3(-3.81,0) 4(-1.27,0) 5(1.27,0) 6(3.81,0) 7(6.35,0) 8(8.89,0)
  silkscreen extent -10.67,-1.4 10.67,1.4, body extent -10.41,-1.21 10.41,1.21, height 8.51
AP8-00852 [mm] "Hirose, ZX Series, USB Micro-AB Recept-RA"
  rect 0.4x1.35 smd: 1(-1.3,2.8) 2(-0.65,2.8) 3(0,2.8) 4(0.65,2.8) 5(1.3,2.8)
  rrect52% 2.1x1.9 hole 0.825 slot 1.5 at 90 deg copper offset 0.437,0: 6(-4.088,0)
  rrect52% 2.1x1.9 on Top Paste: 6(-3.6,0) 7(3.6,0)
  rrect52% 2.1x1.9 hole 0.825 slot 1.5 at 90 deg copper offset -0.437,0: 7(4.088,0)
  rrect100% 1.05x1.25 hole 0.65 slot 0.85 at 90 deg: 8(-2.225,3.125) 9(2.225,3.125)
  rrect100% 1.05x1.25 on Top Paste: 8(-2.225,3.125) 9(2.225,3.125)
  Top Layer LF-Signals region: 0.25,-0.95 2.05,-0.95 2.05,0.95 0.25,0.95
  Top Layer LF-Signals region: -2.05,-0.95 -0.25,-0.95 -0.25,0.95 -2.05,0.95
  Top Layer LF-Signals region: 2.6,-0.95 4.2,-0.95 4.294,-0.941 4.381,-0.915 4.434,-0.891 4.48,-0.862 4.52,-0.832 4.565,-0.791 4.596,-0.753 4.622,-0.716 4.647,-0.673 4.66,-0.64 4.676,-0.6 4.688,-0.55 4.696,-0.505 4.7,-0.45 4.7,0.45 4.696,0.503 4.689,0.548 4.677,0.599 4.661,0.641 4.641,0.683 4.617,0.724 4.589,0.761 4.56,0.797 4.521,0.831 4.483,0.86 4.439,0.888 4.397,0.908 4.354,0.924 4.301,0.939 4.248,0.946 4.2,0.95 2.6,0.95
  Top Layer LF-Signals region: -2.6,0.95 -4.2,0.95 -4.294,0.941 -4.381,0.915 -4.434,0.891 -4.48,0.862 -4.52,0.832 -4.565,0.791 -4.596,0.753 -4.622,0.716 -4.647,0.673 -4.66,0.64 -4.676,0.6 -4.688,0.55 -4.696,0.505 -4.7,0.45 -4.7,-0.45 -4.696,-0.503 -4.689,-0.548 -4.677,-0.599 -4.661,-0.641 -4.641,-0.683 -4.617,-0.724 -4.589,-0.761 -4.56,-0.797 -4.521,-0.831 -4.483,-0.86 -4.439,-0.888 -4.397,-0.908 -4.354,-0.924 -4.301,-0.939 -4.248,-0.946 -4.2,-0.95 -2.6,-0.95
  Top Layer LF-Signals pour cut-out: -3.75,1.975 3.75,1.975 3.75,-1.325 -3.75,-1.325
  Bottom Layer LF-Signals region: -2.6,0.95 -4.2,0.95 -4.294,0.941 -4.381,0.915 -4.434,0.891 -4.48,0.862 -4.52,0.832 -4.565,0.791 -4.596,0.753 -4.622,0.716 -4.647,0.673 -4.66,0.64 -4.676,0.6 -4.688,0.55 -4.696,0.505 -4.7,0.45 -4.7,-0.45 -4.696,-0.503 -4.689,-0.548 -4.677,-0.599 -4.661,-0.641 -4.641,-0.683 -4.617,-0.724 -4.589,-0.761 -4.56,-0.797 -4.521,-0.831 -4.483,-0.86 -4.439,-0.888 -4.397,-0.908 -4.354,-0.924 -4.301,-0.939 -4.248,-0.946 -4.2,-0.95 -2.6,-0.95
  Bottom Layer LF-Signals region: 2.6,-0.95 4.2,-0.95 4.294,-0.941 4.381,-0.915 4.434,-0.891 4.48,-0.862 4.52,-0.832 4.565,-0.791 4.596,-0.753 4.622,-0.716 4.647,-0.673 4.66,-0.64 4.676,-0.6 4.688,-0.55 4.696,-0.505 4.7,-0.45 4.7,0.45 4.696,0.503 4.689,0.548 4.677,0.599 4.661,0.641 4.641,0.683 4.617,0.724 4.589,0.761 4.56,0.797 4.521,0.831 4.483,0.86 4.439,0.888 4.397,0.908 4.354,0.924 4.301,0.939 4.248,0.946 4.2,0.95 2.6,0.95
  silkscreen extent -4.05,1.22 4.05,3.13, body extent -4.32,-2.65 4.33,3.25, height 2.78
AP8-00853 [mm]
  rect 2.4x5 hole 1.2 slot 3 at 90 deg: 1(0,0)
  rect 4.5x2.2 hole 1.3 slot 3 at 0 deg: 2(3.05,-4.9)
  rect 2.2x5 hole 1.2 slot 3.5 at 90 deg: 3(6,0)
  silkscreen extent -7.2,-5 7.3,5, body extent -7.6,-5 6.88,4.47, height 11.18
AP8-00878 [mm] "SAMTEC 0.5mm, 20-pair, High-Speed Differential Pair Socket"
  round 1.02 hole 1.02 unplated: 0(-2.67,-10.06) 0(-2.67,10.06)
  rect 2.27x0.28 smd: 1(2.87,-7.25) 2(-2.87,-7.25) 3(2.87,-6.75) 4(-2.87,-6.75) 5(2.87,-5.75) 6(-2.87,-5.75) 7(2.87,-5.25) 8(-2.87,-5.25) 9(2.87,-4.25) 10(-2.87,-4.25) 11(2.87,-3.75) 12(-2.87,-3.75) 13(2.87,-2.75) 14(-2.87,-2.75) 15(2.87,-2.25) 16(-2.87,-2.25) 17(2.87,-1.25) 18(-2.87,-1.25) 19(2.87,-0.75) 20(-2.87,-0.75) 21(2.87,0.25) 22(-2.87,0.25) 23(2.87,0.75) 24(-2.87,0.75) 25(2.87,1.75) 26(-2.87,1.75) 27(2.87,2.25) 28(-2.87,2.25) 29(2.87,3.25) 30(-2.87,3.25) 31(2.87,3.75) 32(-2.87,3.75) 33(2.87,4.75) 34(-2.87,4.75) 35(2.87,5.25) 36(-2.87,5.25) 37(2.87,6.25) 38(-2.87,6.25) 39(2.87,6.75) 40(-2.87,6.75)
  rect 0.43x2.54 smd: 41(0,-8.065) 44(0,8.065)
  rect 0.43x4.7 smd: 42(0,-3.175) 43(0,3.175)
  silkscreen extent -3.9,-10.9 4.95,10.9, body extent -3.75,-10.67 3.75,10.64, height 3.05
AP8-00884 [mil]
  round 39.37 hole 46.85 unplated: 0(-650,0) 1(650,0)
  rect 50x125.98 smd: 1(-700,-107.01) 2(-700,107.01) 3(-600,-107.01) 4(-600,107.01) 27(600,-107.01) 28(600,107.01) 29(700,-107.01) 30(700,107.01)
  rect 50x145 smd: 5(-500,-97.5) 6(-500,97.5) 7(-400,-97.5) 8(-400,97.5) 9(-300,-97.5) 10(-300,97.5) 11(-200,-97.5) 12(-200,97.5) 13(-100,-97.5) 14(-100,97.5) 15(0,-97.5) 16(0,97.5) 17(100,-97.5) 18(100,97.5) 19(200,-97.5) 20(200,97.5) 21(300,-97.5) 22(300,97.5) 23(400,-97.5) 24(400,97.5) 25(500,-97.5) 26(500,97.5)
  Top Layer LF-Signals region: 575,-169.88 575,-25 607.28,-25 625,-42.72 625,-169.88
  Top Layer LF-Signals region: 725,-169.88 725,-25 692.72,-25 675,-42.72 675,-169.88
  Top Layer LF-Signals region: 575,169.88 575,25 607.28,25 625,42.72 625,169.88
  Top Layer LF-Signals region: 725,169.88 725,25 692.72,25 675,42.72 675,169.88
  Top Layer LF-Signals region: -575,169.88 -575,25 -607.28,25 -625,42.72 -625,169.88
  Top Layer LF-Signals region: -725,169.88 -725,25 -692.72,25 -675,42.72 -675,169.88
  Top Layer LF-Signals region: -575,-169.88 -575,-25 -607.28,-25 -625,-42.72 -625,-169.88
  Top Layer LF-Signals region: -725,-169.88 -725,-25 -692.72,-25 -675,-42.72 -675,-169.88
  silkscreen extent -760,-189 760,189, body extent -750,-145 750,145, height 380
AP8-00910 [mm] "FTSH-110-01-F-DV-007-K"
  rect 2.79x0.74 smd: 1(-2.035,5.715) 2(2.035,5.715) 3(-2.035,4.445) 4(2.035,4.445) 5(-2.035,3.175) 6(2.035,3.175) 7(-2.035,1.905) 8(2.035,1.905) 9(-2.035,0.635) 10(2.035,0.635) 11(-2.035,-0.635) 12(2.035,-0.635) 13(-2.035,-1.905) 14(2.035,-1.905) 15(-2.035,-3.175) 16(2.035,-3.175) 17(-2.035,-4.445) 18(2.035,-4.445) 19(-2.035,-5.715) 20(2.035,-5.715)
  silkscreen extent -4.59,-2.54 4.45,7.13, body extent -2.92,-6.31 2.92,6.31, height 6.11
AP9-00044 [mm]
  rect 1x0.95 smd paste-1: 1(-0.85,0) 2(0.85,0)
  Top Layer LF-Signals region: -0.45,-0.15 0.45,-0.15 0.45,0.15 -0.45,0.15
  silkscreen extent -1.6,-0.72 1.6,0.72, body extent -0.8,-0.4 0.8,0.4, height 0.3

## Part data
C100 C701 C703: library part A01-0500, "Ceramic capacitor, SMD 0805, X5R, 10V, ±20%", Manufacturer=tdk, MPN=C2012X5R1A226M/0.85, TemperatureRange="-55°C to +85°C", AN=A01-0500, Height=0,949999988079071, PartGroup="Capacitors,Ceramic,SMD 0805", Status=Active
C101: library part A01-0634, "Ceramic capacitor, SMD 0805, X5R, 25V, ±10%", Manufacturer=Murata, MPN=GRM21BR61E106KA73L, TemperatureRange="-55 °C to +85 °C", Tolerance=±10%, AN=A01-0634, Height=1,25, PartGroup="Capacitors,Ceramic,SMD 0805", Status=Active
C102: library part A01-0044, "Ceramic capacitor, SMD 0402, X7R, 25V, +/-10%", Manufacturer="YAGEO CORP", MPN=CC0402KRX7R8BB332, TemperatureRange="-55 - +125 deg C", Tolerance="25V, +/-10%", AN=A01-0044, Height=0,550000011920929, PartGroup="Capacitors,Ceramic,SMD 0402", Status=Active
C103: library part A01-0679, "Electric Double-Layer (Supercapacitor), 100mF, SMD, 10.5mm diameter, 25Ω ESR", Manufacturer=Kemet, MPN=FC0H104ZFTBR24, TemperatureRange="-25°C to +70°C", Tolerance=-20/+80%, AN=A01-0679, Height=5,5, PartGroup=Capacitors,Other, Status=Active
C104: library part A01-0050, "Ceramic capacitor, SMD 0402, X7R, 25V, +/-10%", Manufacturer="YAGEO CORP", MPN=CC0402KRX7R8BB103, TemperatureRange="-55 - +125 deg C", Tolerance="25V, +/-10%", AN=A01-0050, Height=0,550000011920929, PartGroup="Capacitors,Ceramic,SMD 0402", Status=Active
C105 C106 C121 C122 C124 C125 C200 C201 C202 C203 C204 C205 C206 C207 C208 C209 C210 C211 C212 C213 C214 C217 C218 C600 C601 C602 C604 C605 C606 C607 C608 C609 C610 C611 C613 C700 C702 C705 C706 C707 C710 C711 C713 C801 C802 C806 C807 C816 C818 C821 C822 C826 C829 C904 C910 C911 C912 C913 C1002 C1003: library part A01-0246, "Ceramic capacitor, SMD 0402, X7R, 16V, +/-10%", Manufacturer=Kemet, MPN=C0402C104K4RACTU, TemperatureRange="-55 - +125 deg C", Tolerance="16V, +/-10%", AN=A01-0246, Height=0,5, PartGroup="Capacitors,Ceramic,SMD 0402", Status=Active
C107 C808 C811 C817 C819 C825 C828: library part A01-0377, "Ceramic capacitor, SMD 0603, X5R, 10V, 10% (de31036)", Manufacturer="WALSIN Technology Corporation", MPN=0603X475K100CT, TemperatureRange="-55 - +85 deg C", Tolerance=10%, AN=A01-0377, Height=0,800000011920929, PartGroup="Capacitors,Ceramic,SMD 0603", Status=Active
C108 C109 C110 C111 C603 C810 C820 C905 C909 C914 C915: library part A01-0300, "Ceramic capacitor, SMD 0402, X5R, 6.3V, +/-20%", Manufacturer=Kemet, MPN=C0402C225M9PAC, TemperatureRange="-55°C to +85°C", Tolerance=±20%, AN=A01-0300, Height=0,5, PartGroup="Capacitors,Ceramic,SMD 0402", Status=Active
C112 C113 C115 C117 C612: library part A01-0360, "Ceramic capacitor, SMD 0805, X5R, 10V, 10 %, (de19441)", Manufacturer=Murata, MPN=GRM21BR61A106KE19L, TemperatureRange="-55 - +85 deg C", Tolerance=10%, AN=A01-0360, Height=1,25, PartGroup="Capacitors,Ceramic,SMD 0805", Status=Active
C114: library part A01-0014, "Ceramic capacitor, SMD 0402, NP0, 50V, +/-5%", Manufacturer="YAGEO CORP", MPN=CC0402CRNPO9BN8R2, TemperatureRange="-55 - +125 deg C", Tolerance="50V, +/-5%", AN=A01-0014, Height=0,550000011920929, PartGroup="Capacitors,Ceramic,SMD 0402", Status=Active
C116: library part A01-0013, "Ceramic capacitor, SMD 0402, NP0, 50V, +/-5%", Manufacturer="YAGEO CORP", MPN=CC0402CRNPO9BN6R8, TemperatureRange="-55 - +125 deg C", Tolerance="50V, +/-5%", AN=A01-0013, Height=0,550000011920929, PartGroup="Capacitors,Ceramic,SMD 0402", Status=Active
C118: library part A01-0021, "Ceramic capacitor, SMD 0402, NP0, 50V, +/-5%", Manufacturer=Murata, MPN=GRM1555C1H330JA01D, TemperatureRange="-55 - +125 deg C", Tolerance="50V, +/-5%", AN=A01-0021, Height=0,550000011920929, PartGroup="Capacitors,Ceramic,SMD 0402", Status=Active
C119 C120 C805 C809: library part A01-0447, "Ceramic capacitor, SMD 0402, X5R, 10V, ±10 %", Manufacturer=AVX, MPN=0402ZD105KAT2A, AN=A01-0447, Height=0,560000002384186, PartGroup="Capacitors,Ceramic,SMD 0402", Status=Active
C123 C1001: library part A01-0017, "Ceramic capacitor, SMD 0402, NP0, 50V, +/-5%", Manufacturer=AVX, MPN=04025A150JAT2A, TemperatureRange="-55 - +125 deg C", Tolerance="50V, +/-5%", AN=A01-0017, Height=0,550000011920929, PartGroup="Capacitors,Ceramic,SMD 0402", Status=Active
C215: library part A01-0492, "Capacitor Tantalum 10V 2.2uF 10% ESR = 6 ohm", Manufacturer=Kemet, MPN=T494A225K010AT, TemperatureRange="- 55 C to + 125 C", Tolerance=±10%, AN=A01-0492, Height=1,79999995231628, PartGroup=Capacitors,Tantalum, Status=Active